# Altium PCB PCB.PcbDoc
Units mm, origin at the board's own origin, x right, y up, seen from the top; angles counter-clockwise.
Board outline 55 x 115 mm, 2 copper layers (Top Layer, Bottom Layer), stack 3 mm thick; 36 components, 19 nets, 95 pads, 0 vias.
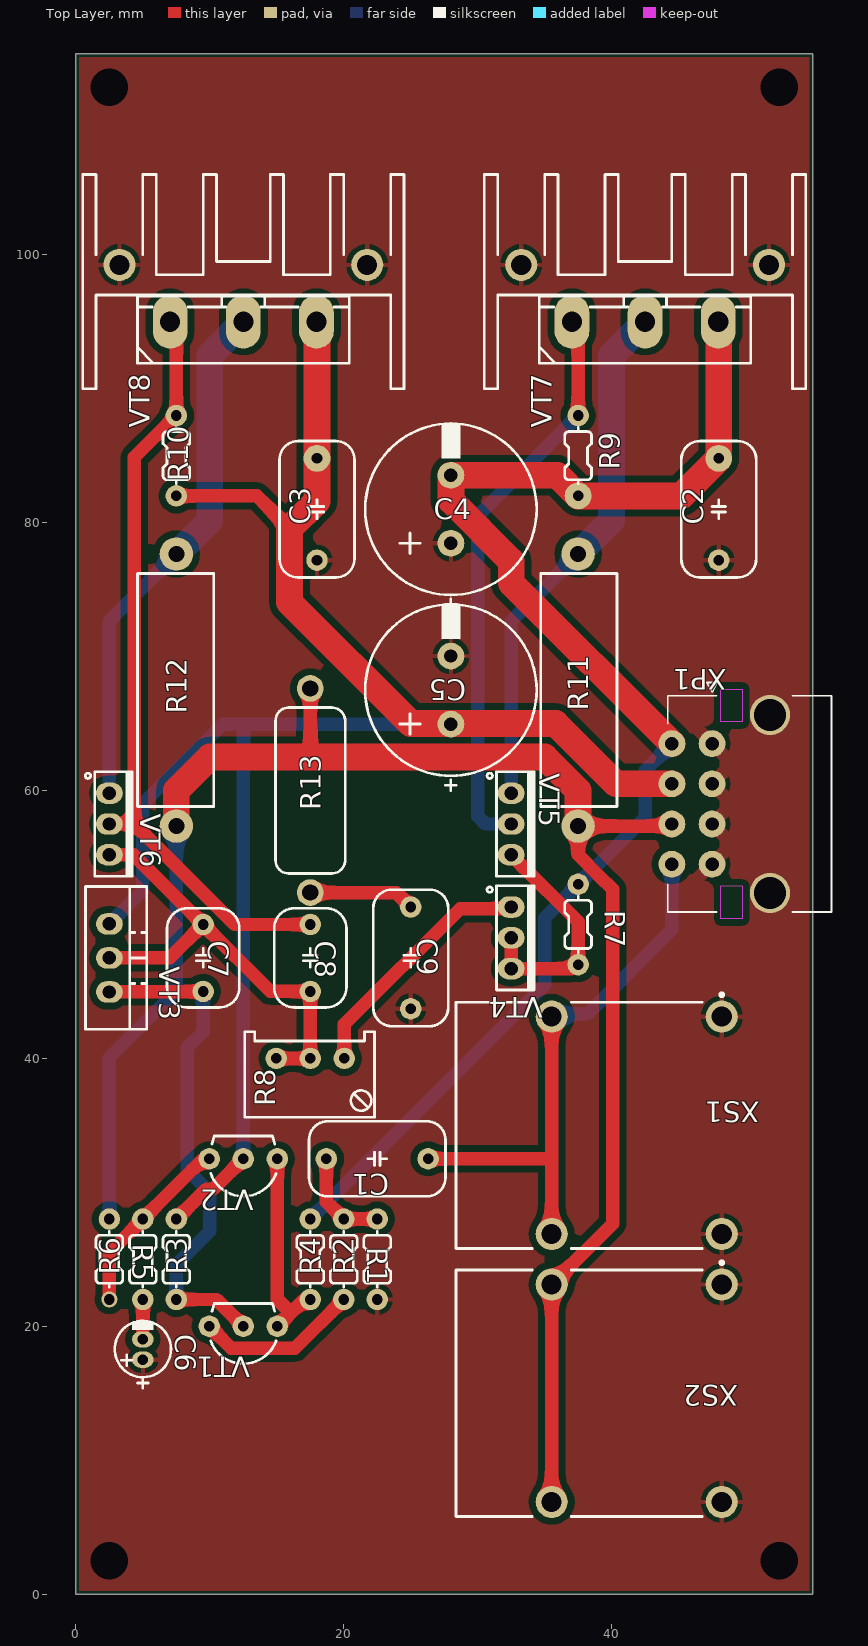
[diagram p0: Top Layer view]
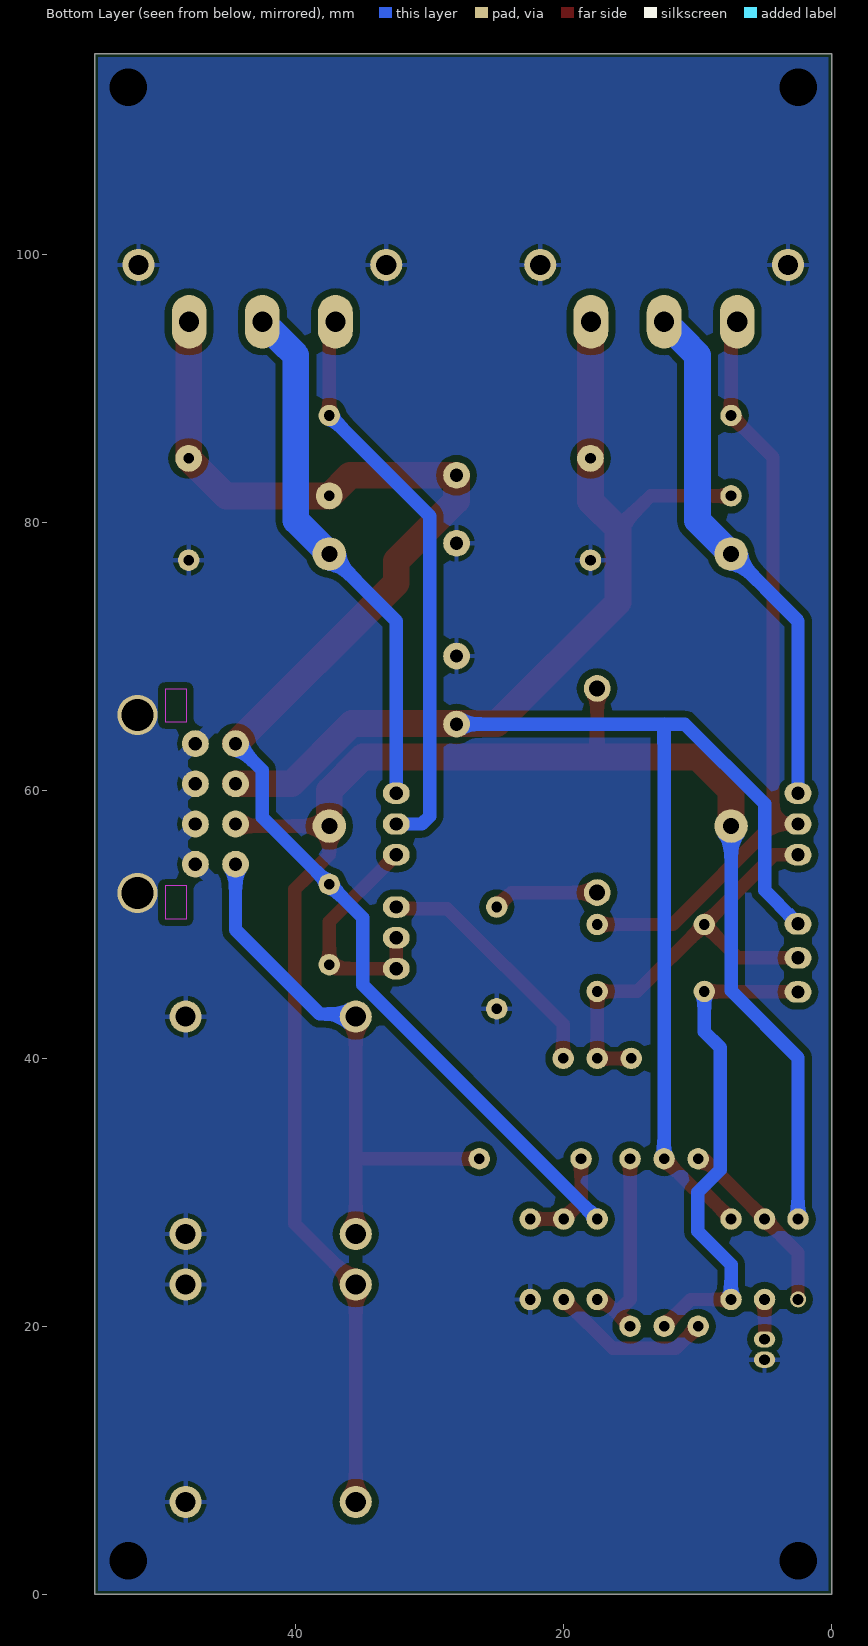
[diagram p1: Bottom Layer view, seen from below]
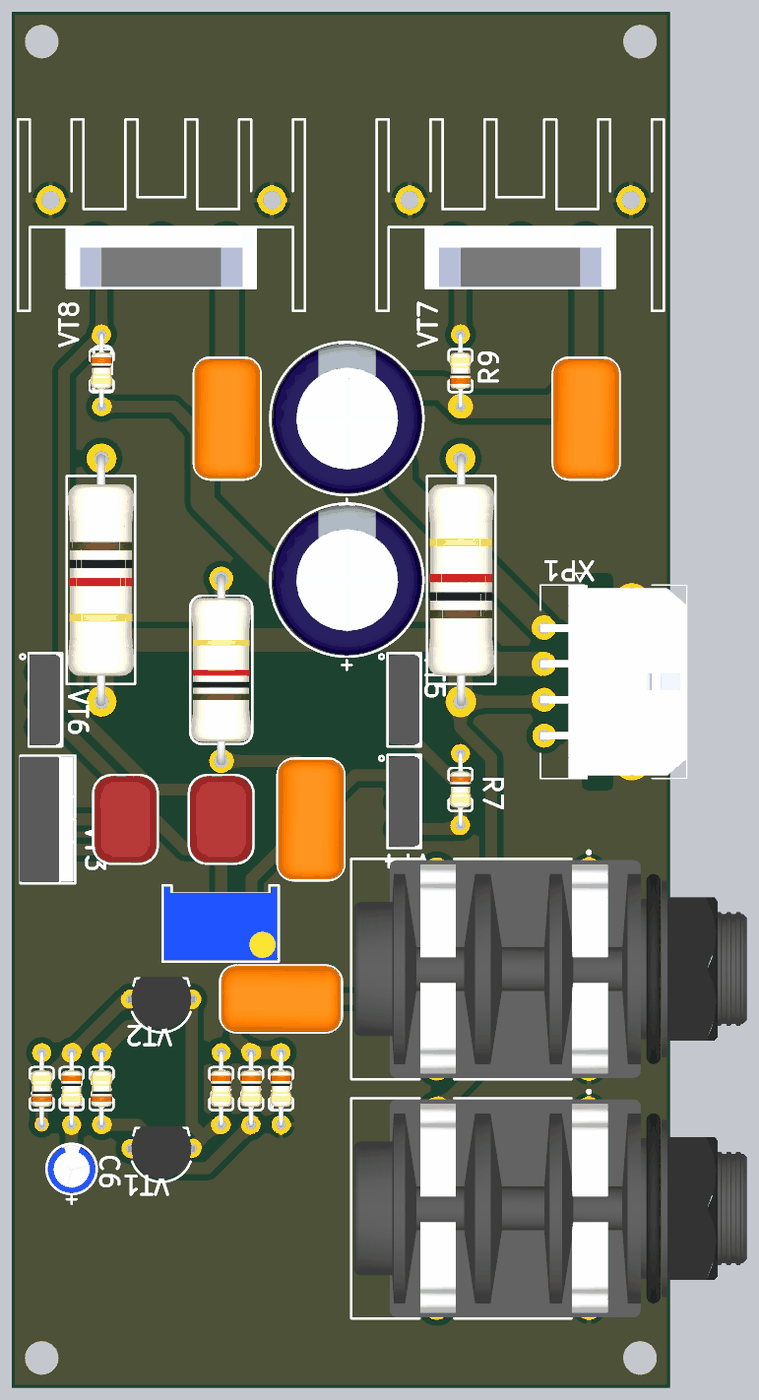
[diagram p2: 3D render of the assembled board from above, using the file's embedded part models]

## Layer stack, top to bottom
Top Solder: solder mask 0.01, Solder Resist, Dk 3.5
Top Layer: signal copper 0.035
Dielectric 1: dielectric 2.93, FR-4, Dk 4.8
Bottom Layer: signal copper 0.035
Bottom Solder: solder mask 0.01, Solder Resist, Dk 3.5

## Board outline
0,0 0,115 55,115 55,0

## Design rules (kind name [scope] priority, off if disabled: settings)
AcuteAngle [All] p1: minimum=3.50000000000000E+0001 checktracksonly=FALSE
BoardOutlineClearance "BoardOutlineClearance 1" [All] p1: gap=0.25 ignorepadtopadclearanceinfootprint=FALSE except(0: Arc-SplitContinuation Track-SplitContinuation SMDPad-SplitContinuation THPad-SplitContinuation Via-SplitContinuation Fill-SplitContinuation Poly-SplitContinuation Region-SplitContinuation Text-SplitContinuation) // Milling
BoardOutlineClearance "BoardOutlineClearance 2" [All] p2: gap=0.4 ignorepadtopadclearanceinfootprint=FALSE except(0: Arc-SplitContinuation Track-SplitContinuation SMDPad-SplitContinuation THPad-SplitContinuation Via-SplitContinuation Fill-SplitContinuation Poly-SplitContinuation Region-SplitContinuation Text-SplitContinuation) // V-Cut
Clearance "Clearance 3 Oz" [All] p1: gap=0.5 ignorepadtopadclearanceinfootprint=FALSE except(0.25: Arc-THPad Track-THPad SMDPad-THPad THPad-THPad; 0.35: Arc-Arc Arc-Track Arc-SMDPad Arc-Via Arc-Text Track-Track Track-SMDPad Track-Via Track-Text SMDPad-SMDPad SMDPad-Via SMDPad-Text THPad-Via THPad-Text Via-Via Via-Text Fill-Text Poly-Text Region-Text Text-Text)
Clearance "Clearance 2 Oz" [All] p2 off: gap=0.3 ignorepadtopadclearanceinfootprint=FALSE except(0.25: Arc-Hole Track-Hole SMDPad-Hole THPad-Hole Via-Hole Fill-Hole Poly-Hole Region-Hole Text-Hole)
Clearance "Clearance-1 1 Oz" [All] p3 off: gap=0.2 ignorepadtopadclearanceinfootprint=FALSE except(0.25: Arc-Hole Track-Hole SMDPad-Hole THPad-Hole Via-Hole Fill-Hole Poly-Hole Region-Hole Text-Hole; 0.5: Arc-Fill Arc-Poly Arc-Region Track-Fill Track-Poly Track-Region SMDPad-Fill SMDPad-Poly SMDPad-Region THPad-Fill THPad-Poly THPad-Region Via-Fill Via-Poly Via-Region Fill-Fill Fill-Poly Fill-Region Poly-Poly Poly-Region Region-Region) // Standart
Clearance "Clearance-2 1 Oz" [All] p4 off: gap=0.15 ignorepadtopadclearanceinfootprint=FALSE except(0.2: Arc-Fill Arc-Poly Track-Fill Track-Poly SMDPad-Fill SMDPad-Poly THPad-Fill THPad-Poly Via-Fill Via-Poly Fill-Fill Fill-Poly Poly-Poly; 0.25: Arc-Hole Track-Hole SMDPad-Hole THPad-Hole Via-Hole Fill-Hole Poly-Hole Region-Hole Text-Hole) // Advance
Clearance "Clearance-1 1/2 Oz" [All] p5 off: gap=0.125 ignorepadtopadclearanceinfootprint=FALSE except(0.2: Arc-Fill Arc-Poly Track-Fill Track-Poly SMDPad-SMDPad SMDPad-Fill SMDPad-Poly THPad-Fill THPad-Poly Via-Fill Via-Poly Fill-Fill Fill-Poly Poly-Poly Poly-Region Poly-Text; 0.25: Arc-Hole Track-Hole SMDPad-Hole THPad-Hole Via-Hole Fill-Hole Poly-Hole Region-Hole Text-Hole) // Standart
Clearance "Clearance-2 1/2 Oz" [All] p6 off: gap=0.1 ignorepadtopadclearanceinfootprint=FALSE except(0.15: Arc-Fill Arc-Poly Track-Fill Track-Poly SMDPad-SMDPad SMDPad-Fill SMDPad-Poly THPad-Fill THPad-Poly Via-Fill Via-Poly Fill-Fill Fill-Poly Poly-Poly Poly-Region Poly-Text; 0.25: Arc-Hole Track-Hole SMDPad-Hole THPad-Hole Via-Hole Fill-Hole Poly-Hole Region-Hole Text-Hole) // Advance
DiffPairsRouting "DiffPairsRouting 1 Oz" [All] p1: maxlimit=0.254 minlimit=0.2 mostfreqgap=0.254 toplayer_minwidth=0.2 toplayer_maxwidth=0.381 toplayer_prefwidth=0.381 bottomlayer_minwidth=0.2 bottomlayer_maxwidth=0.381 bottomlayer_prefwidth=0.381 maxuncoupledlength=12.7
DiffPairsRouting "DiffPairsRouting 1/2 Oz" [All] p2: maxlimit=0.254 minlimit=0.1 mostfreqgap=0.254 toplayer_minwidth=0.1 toplayer_maxwidth=0.381 toplayer_prefwidth=0.381 bottomlayer_minwidth=0.1 bottomlayer_maxwidth=0.381 bottomlayer_prefwidth=0.381 maxuncoupledlength=12.7
Height [All] p1: minheight=0 maxheight=30 prefheight=12.7
HoleSize "Minimum HoleSize" [IsPad] p1: absolutevalues=TRUE maxlimit=5.9 minlimit=0.6 maxpercent=80.000 minpercent=20.000
HoleSize "Minimum HoleSize VIA 1" [IsVia] p2: absolutevalues=TRUE maxlimit=5.9 minlimit=0.3 maxpercent=80.000 minpercent=20.000 // Standart
HoleSize "Minimum HoleSize VIA 2" [IsVia] p3: absolutevalues=TRUE maxlimit=5.9 minlimit=0.2 maxpercent=80.000 minpercent=20.000 // Advance
HoleToHoleClearance Hole2HoleClearance [All] p1: gap=0.25 allowstackedmicrovias=FALSE
MinimumAnnularRing "Minimum AR VIA Standart" [IsVia] p1: minimumring=0.15
MinimumAnnularRing "Minimum AR PAD Standart" [IsPAD] p2: minimumring=0.2
MinimumAnnularRing "Minimum AR VIA Advance" [IsVia] p3: minimumring=0.1
MinimumAnnularRing "Minimum AR PAD Advance" [IsPAD] p4: minimumring=0.15
MinimumSolderMaskSliver "SolderMask Bridge Standart" [All] p1: minsoldermaskwidth=0.15 // All Masks
MinimumSolderMaskSliver "SolderMask Bridge Advance" [All] p2: minsoldermaskwidth=0.1 // Mask LDI
PlaneClearance "PlaneClearance 3 Oz" [All] p1: clearance=0.35
PlaneClearance "PlaneClearance 2 Oz" [All] p2: clearance=0.3
PlaneClearance "PlaneClearance 1 Oz" [All] p3: clearance=0.2
PlaneClearance "PlaneClearance-1 1/2 Oz" [All] p4: clearance=0.2 // Standart
PlaneClearance "PlaneClearance-2 1/2 Oz" [All] p5: clearance=0.15 // Advance
PlaneConnect "TermalConnect 3 Oz" [All] p1: planeconnectstyle=Relief reliefexpansion=0.2 reliefentries=4 reliefconductorwidth=0.35 reliefairgap=0.35 // Standart
PlaneConnect "TermalConnect 2 Oz" [All] p2: planeconnectstyle=Relief reliefexpansion=0.2 reliefentries=4 reliefconductorwidth=0.3 reliefairgap=0.3 // Standart
PlaneConnect "TermalConnect-1 1 Oz" [All] p3: planeconnectstyle=Relief reliefexpansion=0.2 reliefentries=4 reliefconductorwidth=0.2 reliefairgap=0.2 // Standart
PlaneConnect "TermalConnect-2 1 Oz" [All] p4: pad.planeconnectstyle=Relief pad.reliefexpansion=0.15 pad.reliefentries=4 pad.reliefconductorwidth=0.2 pad.reliefairgap=0.2 via.planeconnectstyle=Direct via.reliefexpansion=0.15 via.reliefentries=4 via.reliefconductorwidth=0.15 via.reliefairgap=0.15 // Advance
PlaneConnect "TermalConnect-1 1/2 Oz" [All] p5: planeconnectstyle=Relief reliefexpansion=0.2 reliefentries=4 reliefconductorwidth=0.2 reliefairgap=0.2 // Standart
PlaneConnect "TermalConnect-2 1/2 Oz" [All] p6: pad.planeconnectstyle=Relief pad.reliefexpansion=0.15 pad.reliefentries=4 pad.reliefconductorwidth=0.15 pad.reliefairgap=0.15 via.planeconnectstyle=Direct via.reliefexpansion=0.15 via.reliefentries=4 via.reliefconductorwidth=0.15 via.reliefairgap=0.15 // Advance
PolygonConnect "PolygonConnect 3 Oz" [All] p1: thpad.connectstyle=Relief thpad.reliefconductorwidth=0.35 thpad.reliefentries=4 thpad.polygonreliefangle="90 Angle" thpad.airgapwidth=0.35 smdpad.connectstyle=Relief smdpad.reliefconductorwidth=0.35 smdpad.reliefentries=4 smdpad.polygonreliefangle="90 Angle" smdpad.airgapwidth=0.35 via.connectstyle=Direct via.reliefconductorwidth=0.254 via.reliefentries=4 via.polygonreliefangle="90 Angle" via.airgapwidth=0.254
PolygonConnect "PolygonConnect 2 Oz" [All] p2: thpad.connectstyle=Relief thpad.reliefconductorwidth=0.3 thpad.reliefentries=4 thpad.polygonreliefangle="90 Angle" thpad.airgapwidth=0.3 smdpad.connectstyle=Relief smdpad.reliefconductorwidth=0.3 smdpad.reliefentries=4 smdpad.polygonreliefangle="90 Angle" smdpad.airgapwidth=0.3 via.connectstyle=Direct via.reliefconductorwidth=0.254 via.reliefentries=4 via.polygonreliefangle="90 Angle" via.airgapwidth=0.254
PolygonConnect "PolygonConnect-1 1 Oz" [All] p3: thpad.connectstyle=Relief thpad.reliefconductorwidth=0.2 thpad.reliefentries=4 thpad.polygonreliefangle="90 Angle" thpad.airgapwidth=0.2 smdpad.connectstyle=Relief smdpad.reliefconductorwidth=0.2 smdpad.reliefentries=4 smdpad.polygonreliefangle="90 Angle" smdpad.airgapwidth=0.2 via.connectstyle=Direct via.reliefconductorwidth=0.254 via.reliefentries=4 via.polygonreliefangle="90 Angle" via.airgapwidth=0.254 // Standart
PolygonConnect "PolygonConnect-2 1 Oz" [All] p4: thpad.connectstyle=Relief thpad.reliefconductorwidth=0.15 thpad.reliefentries=4 thpad.polygonreliefangle="90 Angle" thpad.airgapwidth=0.15 smdpad.connectstyle=Relief smdpad.reliefconductorwidth=0.15 smdpad.reliefentries=4 smdpad.polygonreliefangle="90 Angle" smdpad.airgapwidth=0.15 via.connectstyle=Direct via.reliefconductorwidth=0.254 via.reliefentries=4 via.polygonreliefangle="90 Angle" via.airgapwidth=0.254 // Advance
PolygonConnect "PolygonConnect-1 1/2 Oz" [All] p5: thpad.connectstyle=Relief thpad.reliefconductorwidth=0.15 thpad.reliefentries=4 thpad.polygonreliefangle="90 Angle" thpad.airgapwidth=0.2 smdpad.connectstyle=Relief smdpad.reliefconductorwidth=0.2 smdpad.reliefentries=4 smdpad.polygonreliefangle="90 Angle" smdpad.airgapwidth=0.2 via.connectstyle=Direct via.reliefconductorwidth=0.254 via.reliefentries=4 via.polygonreliefangle="90 Angle" via.airgapwidth=0.254 // Standart
PolygonConnect "PolygonConnect-2 1/2 Oz" [All] p6: thpad.connectstyle=Relief thpad.reliefconductorwidth=0.125 thpad.reliefentries=4 thpad.polygonreliefangle="90 Angle" thpad.airgapwidth=0.15 smdpad.connectstyle=Relief smdpad.reliefconductorwidth=0.125 smdpad.reliefentries=4 smdpad.polygonreliefangle="90 Angle" smdpad.airgapwidth=0.15 via.connectstyle=Direct via.reliefconductorwidth=0.254 via.reliefentries=4 via.polygonreliefangle="90 Angle" via.airgapwidth=0.254 // Advance
RoutingCorners [All] p1 off: cornerstyle=45-Degree minsetback=2.54 maxsetback=2.54
RoutingVias [All] p1: holewidth=0.3 width=0.6 viastyle="Through Hole" minholewidth=0.2 minwidth=0.4 maxholewidth=5.9 maxwidth=6.4
ShortCircuit [All] p1 off: allowed=FALSE
SilkToSilkClearance Silk2SilkClearance [All] p1 off: silktosilkclearance=0.15
SilkToSolderMaskClearance Silk2SolderMaskClearance [IsPad] p1 off: minsilkscreentomaskgap=0.15 clearancetoexposedcopper=TRUE
SolderMaskExpansion SolderMaskExpansion-1 [All] p1: expansion=0.05 istentingtop=FALSE // Standart
SolderMaskExpansion "SolderMaskExpansion LDI" [All] p2: expansion=0.025 istentingtop=FALSE // Advance
UnRoutedNet [All] p1: checkbadconnections=TRUE
Width "Width 3 Oz" [All] p1: maxlimit=10 minlimit=0.35 preferedwidth=0.4 checkconnectedcopper=TRUE
Width "Width 2 Oz" [All] p2: maxlimit=10 minlimit=0.3 preferedwidth=0.35 minimp=50.000000 maximp=50.000000 favimp=50.000000 checkconnectedcopper=TRUE
Width "Width 1 Oz" [All] p3: maxlimit=10 minlimit=0.15 preferedwidth=0.2 checkconnectedcopper=TRUE
Width "Width 1/2 Oz" [All] p4: maxlimit=10 minlimit=0.1 preferedwidth=0.125 checkconnectedcopper=TRUE
18 further rules are at their usual default settings.

## Classes and differential pairs
component class Sheet: C1 C2 C3 C4 C5 C6 C7 C8 C9 R1 R2 R3 R4 R5 R6 R7 R8 R9 R10 R11 R12 R13 VT1 VT2 VT3 VT4 VT5 VT6 VT7 VT8 XP1 XS1 XS2

## Components (designator, comment, footprint, x,y, rotation, side; value= is the part's Value field where it differs from the comment)
C1 "Capacitor" C_PLY_10X5#1 22.5,32.5 r180 top
C2 "Capacitor" C_PLY_10X5#2 48,81 r270 top
C3 "Capacitor" C_PLY_10X5#2 18,81 r270 top
C4 "Capactor polar" C_EL_12X25 28,81 r90 top
C5 "Capactor polar" C_EL_12X25 28,67.5 r90 top
C6 "Capactor polar" C_EL_4X7 5,18.262 r90 top
C7 "Capacitor" C_PLY_7X5 9.5,47.5 r90 top
C8 "Capacitor" C_PLY_7X5 17.5,47.5 r90 top
C9 "Capacitor" C_PLY_10X5#1 25,47.5 r270 top
R1 "Res" R0125W_AX025#1 22.5,25 r90 top
R2 "Res" R0125W_AX025#1 20,25 r90 top
R3 "Res" R0125W_AX025#1 7.5,25 r270 top
R4 "Res" R0125W_AX025#1 17.5,25 r90 top
R5 "Res" R0125W_AX025#1 5,25 r90 top
R6 "Res" R0125W_AX025#2 2.5,25 r270 top
R7 "Res" R0125W_AX025#1 37.5,50 r90 top
R8 "POT" POT_3296W 17.5,40 r180 top
R9 "Res" R0125W_AX025#3 37.5,85 r270 top
R10 "Res" R0125W_AX025#1 7.5,85 r90 top
R11 "Res" R2W_AX08 37.5,67.5 r90 top
R12 "Res" R2W_AX08 7.5,67.5 r270 top
R13 "Res" R1W_AX06 17.5,60 r90 top
VT1 "Transistor_PNP" TO92_3FB 12.5,20 r180 top
VT2 "Transistor_PNP" TO92_3FB 12.5,32.5 r180 top
VT3 "BD139G" TO220_3 2.5,47.5 r270 top
VT4 "BD139G" TO126_3 32.5,49 r270 top
VT5 "BD139G" TO126_3 32.5,57.5 r270 top
VT6 "Transistor_PNP" TO126_3 2.5,57.5 r270 top
VT7 "Transistor_PNP" TO247_3 42.5,95 r0 top
VT8 "BD139G" TO247_3 12.5,95 r0 top
XP1 "CONN" MOLEX_430450821 47.5,63.5 r90 top
XS1 "Audio" FP-NMJ4HFD2-MFG 45,35 r0 top
XS2 "Audio" FP-NMJ4HFD2-MFG 45,15 r0 top
ZBOAS472986882 "Comment" "BOASVIEWdrilldrawing:Вид DrillDrawing:2,5:0:0:1" 82.5,2190 r0 top
ZBOAS1112798201 "Comment" "BOASVIEWside:Вид платы слева:2,5:0:0:0" 245,2477.5 r0 top
ZBOAS1590598201 "Comment" "BOASVIEWdrill:Таблица отверстий:0:0:0:0" 366.37,2477.5 r0 top

## Footprints (in the part's own frame and the unit in brackets; to place one, negate y for a bottom-side part, rotate by r counter-clockwise, add the part's x,y. Pads: shape width x height; smd on the part's side, far side on the other; paste and mask are expansions set on the pad)
"BOASVIEWdrill:Таблица отверстий:0:0:0:0" [mm]
"BOASVIEWdrilldrawing:Вид DrillDrawing:2,5:0:0:1" [mm]
"BOASVIEWside:Вид платы слева:2,5:0:0:0" [mm]
C_EL_4X7 [mm] "Cap Elec, D4.0X7.0H pitch: 1.5mm"
  oval 1.2x1.6 hole 0.8: 1(-0.762,0) 2(0.762,0)
  silkscreen extent -2.9,-2.1 2.13,2.1, body extent -2,-2 2,2, height 1
C_EL_12X25 [mm] "Cap Elec, D12.0X25.0H pitch: 5.0mm, RB.2/.5"
  round 2 hole 1: 1(-2.54,0) 2(2.54,0)
  silkscreen extent -7.5,-6.4 6.4,6.4, body extent -6.25,-6.27 6.25,6.21, height 25.8
C_PLY_7X5 [mm] "CAP, POLYESTER, 7.0X5.0mm pitch: 5.0mm"
  round 1.6 hole 0.8: 1(-2.5,0) 2(2.5,0)
  silkscreen extent -3.7,-2.7 3.7,2.7, body extent -3.65,-2.6 3.65,2.6, height 8
C_PLY_10X5#1 [mm] "CAP, POLYESTER, 10X5.5mm pitch: 7.6mm"
  round 1.6 hole 0.8: 1(-3.8,0) 2(3.8,0)
  silkscreen extent -5.1,-2.8 5.1,2.8, body extent -5,-2.75 5,2.75, height 9
C_PLY_10X5#2 [mm] "CAP, POLYESTER, 10X5.5mm pitch: 7.6mm"
  round 2 hole 0.8: 1(-3.8,0)
  round 1.6 hole 0.8: 2(3.8,0)
  silkscreen extent -5.1,-2.8 5.1,2.8, body extent -5,-2.75 5,2.75, height 9
FP-NMJ4HFD2-MFG [mm]
  round 2.4 hole 1.5: 1(-9.475,-8.115) 1(-9.475,8.115) 2(3.225,-8.115) 2(3.225,8.115)
  silkscreen extent -16.63,-9.2 3.35,9.87, body extent -16.73,-9.3 16.73,9.3, height 0.25
MOLEX_430450821 [mm]
  round 3 hole 2.4 mask+0.076: 1(-11.15,-4.32) 1(2.15,-4.32)
  round 2 hole 1: 1(-9,3) 2(-9,0) 3(-6,3) 4(-6,0) 5(-3,3) 6(-3,0) 7(0,3) 8(0,0)
  Keep-Out Layer region: -10.625,-2.26 -13.075,-2.26 -13.075,-0.66 -10.625,-0.66
  Keep-Out Layer region: 4.075,-2.26 1.625,-2.26 1.625,-0.66 4.075,-0.66
  silkscreen extent -12.57,-8.92 4.57,3.32, body extent -12.62,-8.92 3.58,3.32, height 9.27
POT_3296W [mm] "POT, TRIM, 10.0X5.0mm, pitch: 2.5mm 3299W 3296W S64W"
  round 1.6 hole 0.8: 1(-2.54,0) 2(0,0) 3(2.54,0)
  silkscreen extent -4.8,-2 4.9,4.4, body extent -4.73,-1.85 4.8,4.25, height 11.56
R1W_AX06 [mm] "RESISTOR 1 WATT, AXIAL0.6"
  round 2 hole 1.2: 1(-7.62,0) 2(7.62,0)
  silkscreen extent -6.2,-2.6 6.2,2.6, body extent -7.97,-2.49 7.97,2.51, height 5
R2W_AX08 [mm] "RESISTOR 2 WATT, AXIAL0.8"
  round 2.5 hole 1.2: 1(-10.16,0) 2(10.16,0)
  silkscreen extent -8.7,-2.9 8.7,2.8, body extent -10.51,-2.8 10.51,2.7, height 5.5
R0125W_AX025#1 [mm] "RESISTOR 1/8 WATT, AXIAL0.25"
  round 1.6 hole 0.8: 1(-3,0) 2(3,0)
  silkscreen extent -2.1,-1 2.1,1, body extent -3.2,-0.9 3.2,0.9, height 1.9
R0125W_AX025#2 [mm] "RESISTOR 1/8 WATT, AXIAL0.25"
  round 1.6 hole 0.8: 1(-3,0)
  round 1.2 hole 0.8: 2(3,0)
  silkscreen extent -2.1,-1 2.1,1, body extent -3.2,-0.9 3.2,0.9, height 1.9
R0125W_AX025#3 [mm] "RESISTOR 1/8 WATT, AXIAL0.25"
  round 1.6 hole 0.8: 1(-3,0)
  round 2 hole 0.8: 2(3,0)
  silkscreen extent -2.1,-1 2.1,1, body extent -3.2,-0.9 3.2,0.9, height 1.9
TO92_3FB [mm] "TO-92 formed leads, TO-226, SOT54A"
  round 1.6 hole 0.8: 1(-2.54,0) 2(0,0) 3(2.54,0)
  silkscreen extent -2.44,-1.7 2.44,2.8, body extent -2.75,-1.85 2.75,2.5, height 8.2
TO126_3 [mm] "TO126, TO-126, SOT32 (PHIPLIPS), pitch: 2.3mm, 8X3mm"
  oval 1.6x2 hole 1: 1(-2.3,0) 2(0,0) 3(2.3,0)
  silkscreen extent -3.9,-1.8 3.9,1.7, body extent -3.8,-1 3.8,1.55, height 13.19
TO220_3 [mm] "TO-220 3 LEAD, TO-262, pitch: 2.54mm  10x4.5mm"
  oval 1.6x2 hole 1: 1(-2.54,0) 2(0,0) 3(2.54,0)
  silkscreen extent -5.33,-1.78 5.33,2.79, body extent -5.2,-1.85 5.2,2.65, height 19
TO247_3 [mm] "TO247, TO-247, TO-3P pitch: 5.5mm 16x5mm, TO-218"
  oval 2.6x4 hole 1.5: 1(5.461,0) 2(0,0) 3(-5.461,0)
  round 2.4 hole 1.5: 4(-9.25,4.25) 4(9.25,4.25)
  silkscreen extent -12,-5 12,11, body extent -12,-5 12,11, height 25

## Part data
VT3 VT4 VT5 VT8: library part Transistor_NPN, Case/Package=TO-225, Collector Base Voltage (VCBO)=80V, Collector Emitter Saturation Voltage=500mV, Current Rating=1.5A, Emitter Base Voltage (VEBO)=5V, Manufacturer Lifecycle Status=ACTIVE, Max Junction Temperature (Tj)=150°C, Max Power Dissipation=1.25W, Min Operating Temperature=-55°C, Collector Emitter Breakdown Voltage=80V, Collector Emitter Voltage (VCEO)=80V, Contact Plating=Tin, Element Configuration=Single, Height=11.04mm, hFE Min=25, Lead Free="Lead Free", Length=7.74mm, Lifecycle Status=Production, Max Collector Current=1.5A, Max Operating Temperature=150°C, NexarPartId=354669, Number of Elements=1, Number of Pins=3, Packaging=Bulk, Polarity=NPN, Power Dissipation=1.25W, Radiation Hardening=No, REACH SVHC="No SVHC", RoHS=Compliant, Schedule B="8541290080, 8541290080|8541290080, 8541290080|8541290080|8541290080, 8541290080|8541290080|8541290080|8541290080", Voltage Rating (DC)=80V, Weight=4.535924g, Width=2.66mm

## Free pads (board coordinates)
  round 2.2 hole 2.8: 0(2.5,2.5) 0(2.5,112.5) 0(52.5,2.5) 0(52.5,112.5)

## Nets (pads, with @x,y where several pads share a name; then routed paths per layer and width w, separated by ;. In a path a pad name is that pad's centre, name@x,y a point inside that pad or via, vN(x,y) a via of type N, cw(c..) or ccw(c..) an arc to the next point about the centre after c; other vN are vias at no path point)
GND: C2.2 C3.2 C4.1 C5.2 C6.1 C9.2 pad.0 R1.1 VT7.4 VT8.4 XP1.1@51.82,52.35 XP1.1@51.82,65.65 XP1.2 XP1.4 XP1.6 XP1.8 XS1.2 XS2.2
NetC1_1: C1.1 XP1.1@44.5,54.5 XS1.1 | length 41.5
  Top Layer w1: C1.1 35,32.5 ; XS1.1@35.525,26.885 XS1.1@35.525,43.115
  Bottom Layer w1: XS1.1@35.525,43.115 35.725,43.315 38.225,43.315 44.5,49.59 XP1.1@44.5,54.5
NetC1_2: C1.2 R1.2 R2.2 | length 7.5
  Top Layer w1: C1.2 18.7,29.3 R2.2 R1.2
NetC2_1: C2.1 C4.2 R4.2 R7.2 R9.2 VT7.1 XP1.7 | length 105.6
  Top Layer w2: XP1.7 32.5,75.5 32.5,77.142 28,81.642 C4.2 35.96,83.54 R9.2 45.2,82 C2.1 48,94.961 VT7.1
  Bottom Layer w1: R4.2 35,45.5 35,50.5 42.5,58 42.5,61.5 XP1.7
NetC3_1: C3.1 C5.1 R3.1 R10.1 VT2.2 VT3.1 VT8.1 XP1.5 | length 141.2
  Top Layer w1: R3.1 9.75,30.25 10.25,30.25 VT2.2 ; R10.1 13.5,82 16.138,79.362
  Top Layer w2: VT8.1 18,94.961 C3.1 18,81.6 15.95,79.55 15.95,74.05 25,65 35.823,65 40.323,60.5 XP1.5
  Bottom Layer w1: VT3.1 2.538,50.04 2.815,50.317 2.815,50.355 5,52.54 5,59 10.96,64.96 12.5,64.96 ; VT2.2 12.5,64.96 ; C5.1@27.414,64.769 27.809,64.769 C5.1 12.5,64.96
NetC6_2: C6.2 R5.1 | length 3
  Top Layer w1: C6.2 R5.1
NetC7_1: C7.1 R3.2 VT1.2 VT3.3 | length 38.1
  Top Layer w1: VT3.3 2.52,44.98 9.48,44.98 C7.1 ; R3.2 10.5,22 VT1.2
  Bottom Layer w1: R3.2 7.5,24.598 10,27.098 10,30 8.31,31.69 8.31,40.81 9.5,42 C7.1
NetC7_2: C7.2 C8.1 R8.2 R8.3 VT3.2 VT6.3 | length 34.8
  Top Layer w1: VT3.2 7,47.5 C7.2 ; VT6.3 4.3,55.2 C7.2 ; R8.3 R8.2 C8.1 14.5,45 C7.2
NetC8_2: C8.2 R10.2 VT6.2 VT8.3 | length 57.1
  Top Layer w1: VT6.2 4.37,57.5 ; VT8.3 7.039,93.867 7.5,93.406 R10.2 4.37,84.87 4.37,57.5 ; C8.2 11.87,50 4.37,57.5
NetC9_1: C9.1 R13.1 | length 7.9
  Top Layer w1: R13.1 23.92,52.38 C9.1
NetR2_1: R2.1 VT1.3 | length 12.2
  Top Layer w1: VT1.3 11.61,18.35 16.35,18.35 R2.1
NetR4_1: R4.1 VT1.1 VT2.1 | length 15.2
  Top Layer w1: VT1.1@15.02,19.98 VT1.1 16.04,21 ; VT2.1 15.04,22 16.04,21 ; R4.1 17.04,22 16.04,21
NetR5_2: R5.2 R6.2 VT2.3 | length 13.9
  Top Layer w1: R6.2 2.5,25.5 R5.2 9.385,32.385 9.845,32.385 VT2.3
NetR6_1: R6.1 R11.1 R12.2 R13.2 XP1.3 XS2.1 | length 134.4
  Top Layer w1: 17.5,62.5 R13.2 ; XS2.1@35.525,6.885 35.525,23.115 40.075,27.665 40.075,52.617 39.05,53.642 37.5,55.192 R11.1 44.34,57.34 XP1.3
  Top Layer w2: R12.2 7.5,60 10,62.5 17.5,62.5 35,62.5 37.5,60 R11.1
  Bottom Layer w1: R6.1 2.5,40.048 7.5,45.048 R12.2
NetR7_1: R7.1 VT4.2 VT4.3 VT5.3 | length 17.7
  Top Layer w1: VT4.2 VT4.3 37.038,46.7 37.338,47 R7.1 37.5,50.2 33,54.7 33,54.738 32.538,55.2 VT5.3
NetR8_1: R8.1 VT4.1 | length 18.6
  Top Layer w1: R8.1 20.04,42.54 28.685,51.185 32.385,51.185 VT4.1
NetR9_1: R9.1 VT5.2 VT7.3 | length 43
  Top Layer w1: VT7.3 37.039,93.867 37.5,93.406 R9.1
  Bottom Layer w1: VT5.2 30.586,57.5 30,58.086 30,80.5 R9.1
NetR11_2: R11.2 VT5.1 VT7.2 | length 39.7
  Bottom Layer w1: VT5.1 32.5,72.66 R11.2
  Bottom Layer w2: R11.2 40,80.16 40,92.5 41.685,94.185 42.223,94.185 42.5,94.462 VT7.2
NetR12_1: R12.1 VT6.1 VT8.2 | length 39.7
  Bottom Layer w1: VT6.1 2.5,72.66 R12.1
  Bottom Layer w2: R12.1 10,80.16 10,92.5 11.685,94.185 12.223,94.185 12.5,94.462 VT8.2

## Polygon pours and split planes (outlines as drawn)
GND on Top Layer "GND_L01_P001" (solid, remove dead copper, pour order 1): 0,115 55,115 55,0 0,0
GND on Bottom Layer "GND_L02_P000" (solid, remove dead copper, pour order 0): 0,115 55,115 55,0 0,0

## Silkscreen, mask and mechanical layers (free items; w line width, h text height)
Mechanical 1:
  the board outline again, w0.5
Mechanical 7:
  text "BOASFORMAT|А2|1|0|834645670|233858267|1000000000|2:1|" at -37.63,2523.175 h0
  text "7" at 11.536,2513.011 h6.09 r180
  text "2" at -5.679,2513 h6.09 r180
  text "0" at -3.16,2513 h6.09 r180
  text "0" at -0.585,2513 h6.09 r180
  text "." at 0.592,2513 h6.09 r180
  text "4" at 3.495,2513 h6.09 r180
  text "1" at 5.259,2513 h6.09 r180
  text "." at 6.386,2513 h6.09 r180
  text "3" at 8.966,2513 h6.09 r180
  text "." at 12.662,2513 h6.09 r180
  text "1" at 14.433,2513 h6.09 r180
  text "2" at 17.013,2513 h6.09 r180
  text "." at 18.134,2513 h6.09 r180
  text "3" at 20.715,2513 h6.09 r180
  text "0" at 23.233,2513 h6.09 r180
  text "." at 24.411,2513 h6.09 r180
  text "3" at 26.991,2513 h6.09 r180
  text "0" at 29.51,2513 h6.09 r180
  text "." at 30.687,2513 h6.09 r180
  text "1" at 32.458,2513 h6.09 r180
  text "1" at 34.228,2513 h6.09 r180
  text "." at 35.355,2513 h6.09 r180
  text "4" at 38.257,2513 h6.09 r180
  text "У" at 41.148,2513 h6.09 r180
  text "И" at 44.045,2513 h6.09 r180
  text "DimV|0|-113188977|69933041|982017717|3937008|-43307087|2,5||||js12|False|True|False|False|2" at 220,2477.5 h0
  text "DimH|-54133858|0|69933041|982017717|-26574803|3937008|2,5||||js12|False|True|False|False|2" at 220,2477.5 h0
  text "DimH|-2952756|0|82728317|982017717|-14763780|3937008|2,5||±0,23||js15|False|False|False|False|2" at 252.5,2477.5 h0
  text "1" at -20,2380.376 h4.69 r90
  text "0" at -20,2378.643 h4.69 r90
  text "0" at -20,2376.871 h4.69 r90
  text "." at -20,2376.187 h4.69 r90
  text "4" at -20,2374.25 h4.69 r90
  text "1" at -20,2372.965 h4.69 r90
  text "." at -20,2372.16 h4.69 r90
  text "3" at -20,2370.222 h4.69 r90
  text "7" at -19.996,2368.297 h4.69 r90
  text "." at -20,2367.487 h4.69 r90
  text "1" at -20,2366.037 h4.69 r90
  text "2" at -20,2364.1 h4.69 r90
  text "." at -20,2363.299 h4.69 r90
  text "3" at -20,2361.361 h4.69 r90
  text "0" at -20,2359.471 h4.69 r90
  text "." at -20,2358.626 h4.69 r90
  text "3" at -20,2356.689 h4.69 r90
  text "0" at -20,2354.799 h4.69 r90
  text "." at -20,2353.954 h4.69 r90
  text "1" at -20,2352.504 h4.69 r90
  text "1" at -20,2351.054 h4.69 r90
  text "." at -20,2350.249 h4.69 r90
  text "4" at -20,2348.15 h4.69 r90
  text "У" at -20,2346.06 h4.69 r90
  text "И" at -20,2343.965 h4.69 r90
  text "1. Общие допуски формы и расположения - 30893.2-2002 - H. / 2. Шаг координатной сетки 0,25мм ГОСТ Р 51040-97 / 3. Плату изготовить комбинированным позитивным методом. / 4. Класс точности платы по ГОСТ Р 53429-2009 - 2. / 5. Параметры отверстий платы приведены в таблице 1. / 6. Плата должна соответствовать ГОСТ 23752-79, группа жесткости - 1. / 7. Финишное покрытие метализированных поверхностей меди по ГОСТ 9.301-86 толщиной не более 500мкм флюсом ЛТИ-120 ГОСТ 19250-73 и припоем ПОС-61 ГОСТ 21930-76. / 8. Контроль функциональный ручным методом по ГОСТ 23752.1-92. / 9. Остальные технические требования по ОСТ 4 ГО.070.014-75." at 366.37,2166 h6
  text "И" at 452.468,2153.8 h8.6
  text "У" at 456.656,2153.8 h8.6
  text "4" at 460.837,2153.8 h8.6
  text "." at 465.034,2153.8 h8.6
  text "1" at 466.645,2153.8 h8.6
  text "1" at 469.223,2153.8 h8.6
  text "." at 471.801,2153.8 h8.6
  text "0" at 473.484,2153.8 h8.6
  text "3" at 477.11,2153.8 h8.6
  text "." at 480.662,2153.8 h8.6
  text "0" at 482.345,2153.8 h8.6
  text "3" at 485.971,2153.8 h8.6
  text "." at 489.523,2153.8 h8.6
  text "2" at 491.126,2153.8 h8.6
  text "1" at 494.84,2153.8 h8.6
  text "." at 497.418,2153.8 h8.6
  text "7" at 499.029,2153.8 h8.6
  text "3" at 502.726,2153.8 h8.6
  text "." at 506.279,2153.8 h8.6
  text "1" at 507.89,2153.8 h8.6
  text "4" at 510.46,2153.8 h8.6
  text "." at 514.656,2153.8 h8.6
  text "0" at 516.339,2153.8 h8.6
  text "0" at 520.045,2153.8 h8.6
  text "2" at 523.671,2153.8 h8.6
  text "У" at 456.51,2139.944 h6.09
  text "М" at 459.41,2139.944 h6.09
  text "З" at 462.804,2139.944 h6.09
  text "Ч" at 465.504,2139.944 h6.09
  text "н" at 469.721,2139.944 h6.09
  text "а" at 472.282,2139.944 h6.09
  text "К" at 385.204,2134.006 h4.38
  text "р" at 387.294,2134.006 h4.38
  text "у" at 389.231,2134.006 h4.38
  text "г" at 391.157,2134.006 h4.38
  text "л" at 393.094,2134.006 h4.38
  text "о" at 395.011,2134.006 h4.38
  text "в" at 396.94,2134.006 h4.38
  text "В" at 399.542,2134.006 h4.38
  text "." at 401.798,2134.006 h4.38
  text "С" at 403.224,2134.006 h4.38
  text "." at 405.181,2134.006 h4.38
  text "б" at 436.199,2133.661 h6.09
  text "и" at 438.794,2133.661 h6.09
  text "п" at 441.388,2133.661 h6.09
  text "о" at 443.938,2133.661 h6.09
  text "л" at 446.538,2133.661 h6.09
  text "я" at 449.116,2133.661 h6.09
  text "р" at 451.694,2133.661 h6.09
  text "н" at 454.277,2133.661 h6.09
  text "ы" at 456.855,2133.661 h6.09
  text "х" at 459.789,2133.661 h6.09
  text "т" at 463.622,2133.661 h6.09
  text "р" at 466.838,2133.661 h6.09
  text "а" at 469.405,2133.661 h6.09
  text "н" at 472.322,2133.661 h6.09
  text "з" at 474.899,2133.661 h6.09
  text "и" at 477.138,2133.661 h6.09
  text "с" at 479.716,2133.661 h6.09
  text "т" at 481.988,2133.661 h6.09
  text "о" at 485.182,2133.661 h6.09
  text "р" at 487.783,2133.661 h6.09
  text "а" at 490.349,2133.661 h6.09
  text "х" at 493.3,2133.661 h6.09
  text "С" at 383.731,2128.85 h4.38
  text "е" at 385.676,2128.85 h4.38
  text "л" at 387.618,2128.85 h4.38
  text "и" at 389.543,2128.85 h4.38
  text "в" at 391.464,2128.85 h4.38
  text "а" at 393.41,2128.85 h4.38
  text "н" at 395.516,2128.85 h4.38
  text "о" at 397.429,2128.85 h4.38
  text "в" at 399.359,2128.85 h4.38
  text "К" at 401.316,2128.85 h4.38
  text "." at 403.25,2128.85 h4.38
  text "В" at 403.894,2128.85 h4.38
  text "." at 405.988,2128.85 h4.38
  text "П" at 451.255,2128.506 h4.38
  text "л" at 453.345,2128.506 h4.38
  text "а" at 455.271,2128.506 h4.38
  text "т" at 457.377,2128.506 h4.38
  text "а" at 460.265,2128.506 h4.38
  text "п" at 463.016,2128.506 h4.38
  text "е" at 464.937,2128.506 h4.38
  text "ч" at 466.871,2128.506 h4.38
  text "а" at 468.804,2128.506 h4.38
  text "т" at 470.75,2128.506 h4.38
  text "н" at 473.488,2128.506 h4.38
  text "а" at 475.248,2128.506 h4.38
  text "я" at 477.19,2128.506 h4.38
  text "М" at 509.286,2118.378 h4.38
  text "Г" at 511.703,2118.378 h4.38
  text "Т" at 513.632,2118.378 h4.38
  text "У" at 515.731,2118.378 h4.38
  text "и" at 518.78,2118.378 h4.38
  text "м" at 520.725,2118.378 h4.38
  text "." at 522.82,2118.378 h4.38
  text "Н" at 524.592,2118.378 h4.38
  text "." at 526.686,2118.378 h4.38
  text "Э" at 528.459,2118.378 h4.38
  text "." at 530.714,2118.378 h4.38
  text "Б" at 532.486,2118.378 h4.38
  text "а" at 534.569,2118.378 h4.38
  text "у" at 536.675,2118.378 h4.38
  text "м" at 538.609,2118.378 h4.38
  text "а" at 540.691,2118.378 h4.38
  text "н" at 542.797,2118.378 h4.38
  text "а" at 544.719,2118.378 h4.38
  text "С" at 442.853,2115.844 h4.38
  text "т" at 444.81,2115.844 h4.38
  text "е" at 447.698,2115.844 h4.38
  text "к" at 449.644,2115.844 h4.38
  text "л" at 451.573,2115.844 h4.38
  text "о" at 453.49,2115.844 h4.38
  text "т" at 455.444,2115.844 h4.38
  text "е" at 458.331,2115.844 h4.38
  text "к" at 460.116,2115.844 h4.38
  text "с" at 461.876,2115.844 h4.38
  text "т" at 463.338,2115.844 h4.38
  text "о" at 466.057,2115.844 h4.38
  text "л" at 467.845,2115.844 h4.38
  text "и" at 469.609,2115.844 h4.38
  text "т" at 471.394,2115.844 h4.38
  text "F" at 474.938,2115.844 h4.38
  text "R" at 476.71,2115.844 h4.38
  text "4" at 478.64,2115.844 h4.38
  text "-" at 480.573,2115.844 h4.38
  text "T" at 482.345,2115.844 h4.38
  text "g" at 484.283,2115.844 h4.38
  text "1" at 486.055,2115.844 h4.38
  text "3" at 487.34,2115.844 h4.38
  text "5" at 489.116,2115.844 h4.38
  text "К" at 517.011,2114.35 h4.38
  text "а" at 519.094,2114.35 h4.38
  text "ф" at 521.18,2114.35 h4.38
  text "е" at 524.088,2114.35 h4.38
  text "д" at 526.021,2114.35 h4.38
  text "р" at 527.963,2114.35 h4.38
  text "а" at 529.888,2114.35 h4.38
  text "И" at 532.639,2114.35 h4.38
  text "У" at 534.734,2114.35 h4.38
  text "4" at 536.824,2114.35 h4.38
  text "I" at 457.683,2111.333 h4.38
  text "P" at 458.489,2111.333 h4.38
  text "C" at 460.559,2111.333 h4.38
  text "-" at 462.512,2111.333 h4.38
  text "4" at 464.446,2111.333 h4.38
  text "1" at 466.544,2111.333 h4.38
  text "0" at 468.031,2111.333 h4.38
  text "1" at 469.928,2111.333 h4.38
  text "/" at 471.241,2111.333 h4.38
  text "2" at 472.985,2111.333 h4.38
  text "1" at 474.761,2111.333 h4.38
  text "Г" at 514.597,2110.322 h4.38
  text "р" at 516.563,2110.322 h4.38
  text "у" at 518.496,2110.322 h4.38
  text "п" at 520.397,2110.322 h4.38
  text "п" at 522.331,2110.322 h4.38
  text "а" at 524.252,2110.322 h4.38
  text "И" at 527.164,2110.322 h4.38
  text "У" at 529.258,2110.322 h4.38
  text "4" at 531.349,2110.322 h4.38
  text "-" at 533.443,2110.322 h4.38
  text "7" at 535.381,2110.322 h4.38
  text "3" at 537.31,2110.322 h4.38
  text "Б" at 539.247,2110.322 h4.38
  text "SET2|Superlayer=MechanicalLayer7|Wsuperlayer=MechanicalLayer8|Layergrid=MechanicalLayer9|Werase=MechanicalLayer11|Layermark=MechanicalLayer12|Layerstamp=MechanicalLayer13|Thinline=0,15|Basicline=0,6|Gridline=0,1|Boardline=0,6|Contourpolygonline=0,3|PcbGridStep=1|PcbGridNumbering=False|PcbGridCleareanceAtView=0|PcbGridNumberEach=l5|PcbGridLineEach=l1|PcbGridCountSecondaryStrip=9|PcbGridEnabledStrip=True|PcbGridHorizontal90=False|PcbGridWhiteAreaBeforeText=False|PcbSignalGridEnabled=True|PcbSignalShowBukva=True|RealSignalLayerNames=False|PcbGridEnabledBothSide=False|PcbPolarGridEnabled=False|PcbPolarGridAngleStep=10|PcbPolarGridRadialStep=10|PcbPolarGridCenterPcbGrid=False|SilkShowPad=True|SilkViewName=Слой маркировки|SilkShowHole=True|SilkShowAxis=True|SilkShowBukva=True|SilkShowGrid=False|SolderShowGrid=False|SolderViewName=Слой маски|SolderShowAxis=False|SolderShowBukva=False|MainViewShowGrid=False|MainViewMinDiameterHoles=2|MainViewUseShapesDrill=False|ShowBukvaOnSboky=True|ShowBukvaViews=True|Density=2,2|CustomHoleSizeFactor=2|TableName=Таблица 1|RazrezWidth=100|RealLayerNames=False|RazrezShowBukva=False|RazrezBukva=В-В|Sher=Ra 25|Asstoplayer=MechanicalLayer1|Asstoplayer2=None|Assbottomlayer=MechanicalLayer2|Assbottomlayer2=None|AssMinDiameterHoles=2|AssDim=False|AssMech=False|AssSilk=False|AssComponentSilk=False|AssFreeSilk=False|AssSmdPads=False|AssGridEnable=False|AssShowBukva=True|Mirror=Horisontal|PcbGridFontSize=5|PcbGridCenterZero=False|TTStampDistance=12|MainFontSize=3,5|PolyShtrihEnable=True|RegionShtrihEnable=False|PolyStep=2|PcbDrillDrawingGridEnabled=True|PcbDrillDrawingViewName=Слой сверловки|PcbDrillDrawingShowBukva=False|PcbDrillDrawingShowAxis=True|PcbSignalLayersUseDrill=True|PcbSignalLayersUseWhiteHoles=False|PcbSignalLayersUseShapesDrill=True|PcbSignalLayersShowAxis=True" at -37.63,-16.8 h0
  text "BOASVIADRILLTABLE:" at -37.63,-16.825 h0
  text "2BOASDRILLTABLE:circle0001,314961,Да,41,True,js12|circle1101,393701,Да,24,True,js12|circle0011,472441,Да,6,True,js12|circle0110,590551,Да,18,True,js12|circle1010,944882,Да,2,True,H14|circle0101,1102362,Да,4,True,H14" at -37.63,-16.825 h0
Mechanical 8:
  region: 252.577,2487.423 254.285,2486.761 257.999,2486.27 258,2487.404 257.068,2487.405 257.5,2486.842 252.577,2487.497
  region: 252.577,2487.577 254.285,2488.239 257.999,2488.73 258,2487.596 257.068,2487.595 257.5,2488.158 252.577,2487.503
  region: 244.923,2487.577 243.215,2488.239 239.501,2488.73 239.5,2487.596 240.432,2487.595 240,2488.158 244.923,2487.503
  region: 244.923,2487.423 243.215,2486.761 239.501,2486.27 239.5,2487.404 240.432,2487.405 240,2486.842 244.923,2487.497
  region: 230.077,2190.077 230.739,2191.785 231.23,2195.499 230.096,2195.5 230.095,2194.568 230.658,2195 230.003,2190.077
  region: 229.923,2190.077 229.261,2191.785 228.77,2195.499 229.904,2195.5 229.905,2194.568 229.342,2195 229.997,2190.077
  region: 229.923,2477.423 229.261,2475.715 228.77,2472.001 229.904,2472 229.905,2472.932 229.342,2472.5 229.997,2477.423
  region: 230.077,2477.423 230.739,2475.715 231.23,2472.001 230.096,2472 230.095,2472.932 230.658,2472.5 230.003,2477.423
  region: 219.923,2487.577 218.215,2488.239 214.501,2488.73 214.5,2487.596 215.432,2487.595 215,2488.158 219.923,2487.503
  region: 219.923,2487.423 218.215,2486.761 214.501,2486.27 214.5,2487.404 215.432,2487.405 215,2486.842 219.923,2487.497
  region: 82.577,2487.423 84.285,2486.761 87.999,2486.27 88,2487.404 87.068,2487.405 87.5,2486.842 82.577,2487.497
  region: 82.577,2487.577 84.285,2488.239 87.999,2488.73 88,2487.596 87.068,2487.595 87.5,2488.158 82.577,2487.503
Mechanical 9:
  region: 252.5,2487.5 257.5,2488.158 257,2487.5 257.5,2486.842
  region: 245,2487.5 240,2486.842 240.5,2487.5 240,2488.158
  region: 230,2190 229.342,2195 230,2194.5 230.658,2195
  region: 230,2477.5 230.658,2472.5 230,2473 229.342,2472.5
  region: 220,2487.5 215,2486.842 215.5,2487.5 215,2488.158
  region: 82.5,2487.5 87.5,2488.158 87,2487.5 87.5,2486.842
  lines w0.15: 82.5,2477.5 82.5,2488.5 ; 82.5,2487.5 220,2487.5 ; 220,2190 231,2190 ; 220,2488.5 220,2477.5 231,2477.5 ; 223.595,2487.5 260.5,2487.5 ; 230,2190 230,2477.5 ; 245,2477.5 245,2488.5 ; 252.5,2477.5 252.5,2488.5
  text "55±0,15" at 145.485,2490.03 h5.38
  text "3" at 227.715,2490.03 h5.38
  text "±0,23" at 229.751,2490.03 h5.38
  text "115±0,175" at 227.47,2326.888 h5.38 r90
Top 3D Body:
  lines w0.15: 366.37,2113.175 431.37,2113.175 ; 366.37,2118.175 431.37,2118.175 ; 366.37,2123.175 431.37,2123.175 ; 366.37,2128.175 431.37,2128.175 ; 366.37,2133.175 431.37,2133.175 ; 366.37,2148.175 431.37,2148.175 ; 366.37,2153.175 431.37,2153.175 ; 366.37,2158.175 431.37,2158.175 ; 506.33,2128.175 506.33,2143.175 ; 511.35,2128.175 511.35,2143.175 ; 528.07,2505.275 531.17,2499.875 536.77,2509.675 ; -37.63,2103.175 556.37,2103.175 556.37,2523.175 -37.63,2523.175 -37.63,2103.175
  lines w0.6: -29.63,2133.175 -17.63,2133.175 ; -29.63,2168.175 -17.63,2168.175 ; -29.63,2193.175 -17.63,2193.175 ; -29.63,2218.175 -17.63,2218.175 ; -29.63,2335.175 -17.63,2335.175 ; -24.63,2108.175 -24.63,2253.175 ; -24.63,2275.175 -24.63,2395.175 ; -17.63,2253.175 -29.63,2253.175 -29.63,2108.175 -17.63,2108.175 ; -17.63,2275.175 -29.63,2275.175 -29.63,2395.175 -17.63,2395.175 ; -17.63,2504.175 52.37,2504.175 52.37,2518.175 ; 366.37,2108.175 366.37,2163.175 551.37,2163.175 ; 366.37,2138.175 431.37,2138.175 ; 366.37,2143.175 431.37,2143.175 ; 373.37,2138.175 373.37,2163.175 ; 383.37,2108.175 383.37,2163.175 ; 406.37,2108.175 406.37,2163.175 ; 421.37,2108.175 421.37,2163.175 ; 431.37,2108.175 431.37,2163.175 551.37,2163.175 ; 431.37,2123.175 501.37,2123.175 551.37,2123.175 ; 431.37,2148.175 551.37,2148.175 ; 488.37,2507.175 493.37,2498.175 500.97,2512.175 ; 501.07,2512.175 543.37,2512.175 ; 501.37,2108.175 501.37,2148.175 ; 501.37,2128.175 551.37,2128.175 ; 501.37,2143.175 516.37,2143.175 551.37,2143.175 ; 516.37,2128.175 516.37,2148.175 ; 521.94,2123.175 521.94,2128.175 ; 533.37,2128.175 533.37,2148.175 ; 551.37,2171.175 551.37,2163.175 ; -17.63,2108.175 551.37,2108.175 551.37,2518.175 -17.63,2518.175 -17.63,2108.175
  text "Ra 25" at 501.07,2499.875 h10.75
  text "(" at 524.37,2499.875 h10.75
  text ")" at 535.37,2499.875 h10.75
  text "Перв. примен." at -25.592,2355.154 h5.38 r90
  text "Справ. №" at -25.592,2297.679 h5.38 r90
  text "Подп. и дата" at -25.592,2225.746 h5.38 r90
  text "Инв. № дубл." at -25.592,2196.261 h5.38 r90
  text "Взам. инв. №" at -25.592,2171.283 h5.38 r90
  text "Лит." at 505.564,2144.137 h5.38
  text "Масса" at 520.286,2144.137 h5.38
  text "Масштаб" at 535.206,2144.137 h5.38
  text "Подп. и дата" at -25.592,2141.246 h5.38 r90
  text "Изм." at 366.939,2139.137 h5.38
  text "Лист" at 374.228,2139.137 h5.38
  text "№ докум." at 388.37,2139.137 h5.38
  text "Подп." at 410.143,2139.137 h5.38
  text "Дата" at 422.163,2139.137 h5.38
  text "Разраб." at 366.903,2133.946 h5.38
  text "42 г" at 520.018,2133.478 h7.68
  text "2:1" at 539.157,2133.478 h7.68
  text "Пров." at 366.903,2128.946 h5.38
  text "Т.контр." at 366.903,2123.946 h5.38
  text "Лист" at 502.812,2123.946 h5.38
  text "Листов" at 523.855,2123.946 h5.38
  text "1" at 543.77,2123.946 h5.38
  text "Н.контр." at 366.903,2113.946 h5.38
  text "Инв. № подл." at -25.592,2111.261 h5.38 r90
  text "Утв." at 366.903,2108.946 h5.38
  text "Копировал" at 441.903,2103.946 h5.38
  text "Формат А2" at 522.491,2103.946 h5.38

## Text inside footprints (layer, text, board x,y; h text height)
ZBOAS472986882: Mechanical 7 "55" at 216.695,2180.122 h8.75; Mechanical 7 "50" at 204.147,2180.122 h8.75; Mechanical 7 "45" at 191.699,2180.122 h8.75; Mechanical 7 "40" at 179.151,2180.122 h8.75; Mechanical 7 "35" at 166.695,2180.122 h8.75; Mechanical 7 "30" at 154.147,2180.122 h8.75; Mechanical 7 "25" at 141.517,2180.122 h8.75; Mechanical 7 "20" at 128.968,2180.122 h8.75; Mechanical 7 "15" at 117.59,2180.122 h8.75; Mechanical 7 "10" at 105.042,2180.122 h8.75; Mechanical 7 "5" at 93.125,2180.122 h8.75; Mechanical 7 "0" at 80.706,2180.122 h8.75; Mechanical 7 "115" at 71.534,2474.997 h8.75; Mechanical 7 "110" at 71.437,2462.497 h8.75; Mechanical 7 "105" at 70.465,2449.997 h8.75; Mechanical 7 "100" at 70.368,2437.497 h8.75; Mechanical 7 "95" at 72.247,2424.997 h8.75; Mechanical 7 "90" at 72.15,2412.497 h8.75; Mechanical 7 "85" at 71.793,2399.997 h8.75; Mechanical 7 "80" at 71.696,2387.497 h8.75; Mechanical 7 "75" at 72.603,2374.997 h8.75; Mechanical 7 "70" at 72.506,2362.497 h8.75; Mechanical 7 "65" at 71.793,2349.997 h8.75; Mechanical 7 "60" at 71.696,2337.497 h8.75; Mechanical 7 "55" at 71.89,2324.997 h8.75; Mechanical 7 "50" at 71.793,2312.497 h8.75; Mechanical 7 "45" at 71.898,2299.997 h8.75; Mechanical 7 "40" at 71.801,2287.497 h8.75; Mechanical 7 "35" at 71.89,2274.997 h8.75; Mechanical 7 "30" at 71.793,2262.497 h8.75; Mechanical 7 "25" at 71.534,2249.997 h8.75; Mechanical 7 "20" at 71.437,2237.497 h8.75; Mechanical 7 "15" at 73.68,2224.997 h8.75; Mechanical 7 "10" at 73.583,2212.497 h8.75; Mechanical 7 "5" at 74.75,2199.997 h8.75; Mechanical 7 "0" at 74.912,2187.497 h8.75
ZBOAS1590598201: Mechanical 12 "-" at 462.091,2401.458 h5.38; Mechanical 12 "Да" at 496.75,2401.458 h5.38; Mechanical 12 "+0,25" at 429.028,2404.147 h3.84; Mechanical 12 "2,8" at 422.924,2401.458 h5.38; Mechanical 12 "4" at 525.591,2401.458 h5.38; Mechanical 12 "3,0" at 460.479,2413.41 h5.38; Mechanical 12 "Да" at 496.75,2413.41 h5.38; Mechanical 12 "+0,25" at 428.555,2416.1 h3.84; Mechanical 12 "2,4" at 423.161,2413.41 h5.38; Mechanical 12 "2" at 525.196,2413.41 h5.38; Mechanical 12 "2,6" at 460.509,2426.662 h5.38; Mechanical 12 "Да" at 496.75,2426.662 h5.38; Mechanical 12 "1,5±0,05" at 419.496,2426.662 h5.38; Mechanical 12 "18" at 524.915,2426.662 h5.38; Mechanical 12 "2,5" at 460.4,2439.362 h5.38; Mechanical 12 "Да" at 496.75,2439.362 h5.38; Mechanical 12 "1,2±0,05" at 419.387,2439.362 h5.38; Mechanical 12 "6" at 525.407,2439.362 h5.38; Mechanical 12 "1,6" at 461.168,2449.712 h5.38; Mechanical 12 "Да" at 496.75,2449.712 h5.38; Mechanical 12 "1±0,05" at 420.705,2449.712 h5.38; Mechanical 12 "24" at 524.492,2449.712 h5.38; Mechanical 12 "1,6" at 461.168,2459.212 h5.38; Mechanical 12 "Да" at 496.75,2459.212 h5.38; Mechanical 12 "0,8±0,05" at 418.807,2459.212 h5.38; Mechanical 12 "41" at 524.564,2459.212 h5.38; Mechanical 12 "отв." at 523.335,2466.962 h5.38; Mechanical 12 "Кол." at 523.489,2472.962 h5.38; Mechanical 12 "металлизации" at 487.697,2466.962 h5.38; Mechanical 12 "Наличие" at 492.538,2472.962 h5.38; Mechanical 12 "площадки, мм" at 452.386,2466.962 h5.38; Mechanical 12 "Диаметр контактной" at 445.87,2472.962 h5.38; Mechanical 12 "мм" at 423.26,2466.962 h5.38; Mechanical 12 "Диаметр отв.," at 414.545,2472.962 h5.38; Mechanical 12 "обозначение отв." at 373.152,2466.962 h5.38; Mechanical 12 "Условное" at 379.182,2472.962 h5.38; Mechanical 12 "Таблица 1" at 366.37,2479 h5.38